# Altium PCB PCB.PcbDoc
Units mil, origin at the board's own origin, x right, y up, seen from the top; angles counter-clockwise.
Board outline 6000 x 4000 mil, 2 copper layers (Top Layer, Bottom Layer); 6 components, 0 nets, 182 pads, 0 vias.
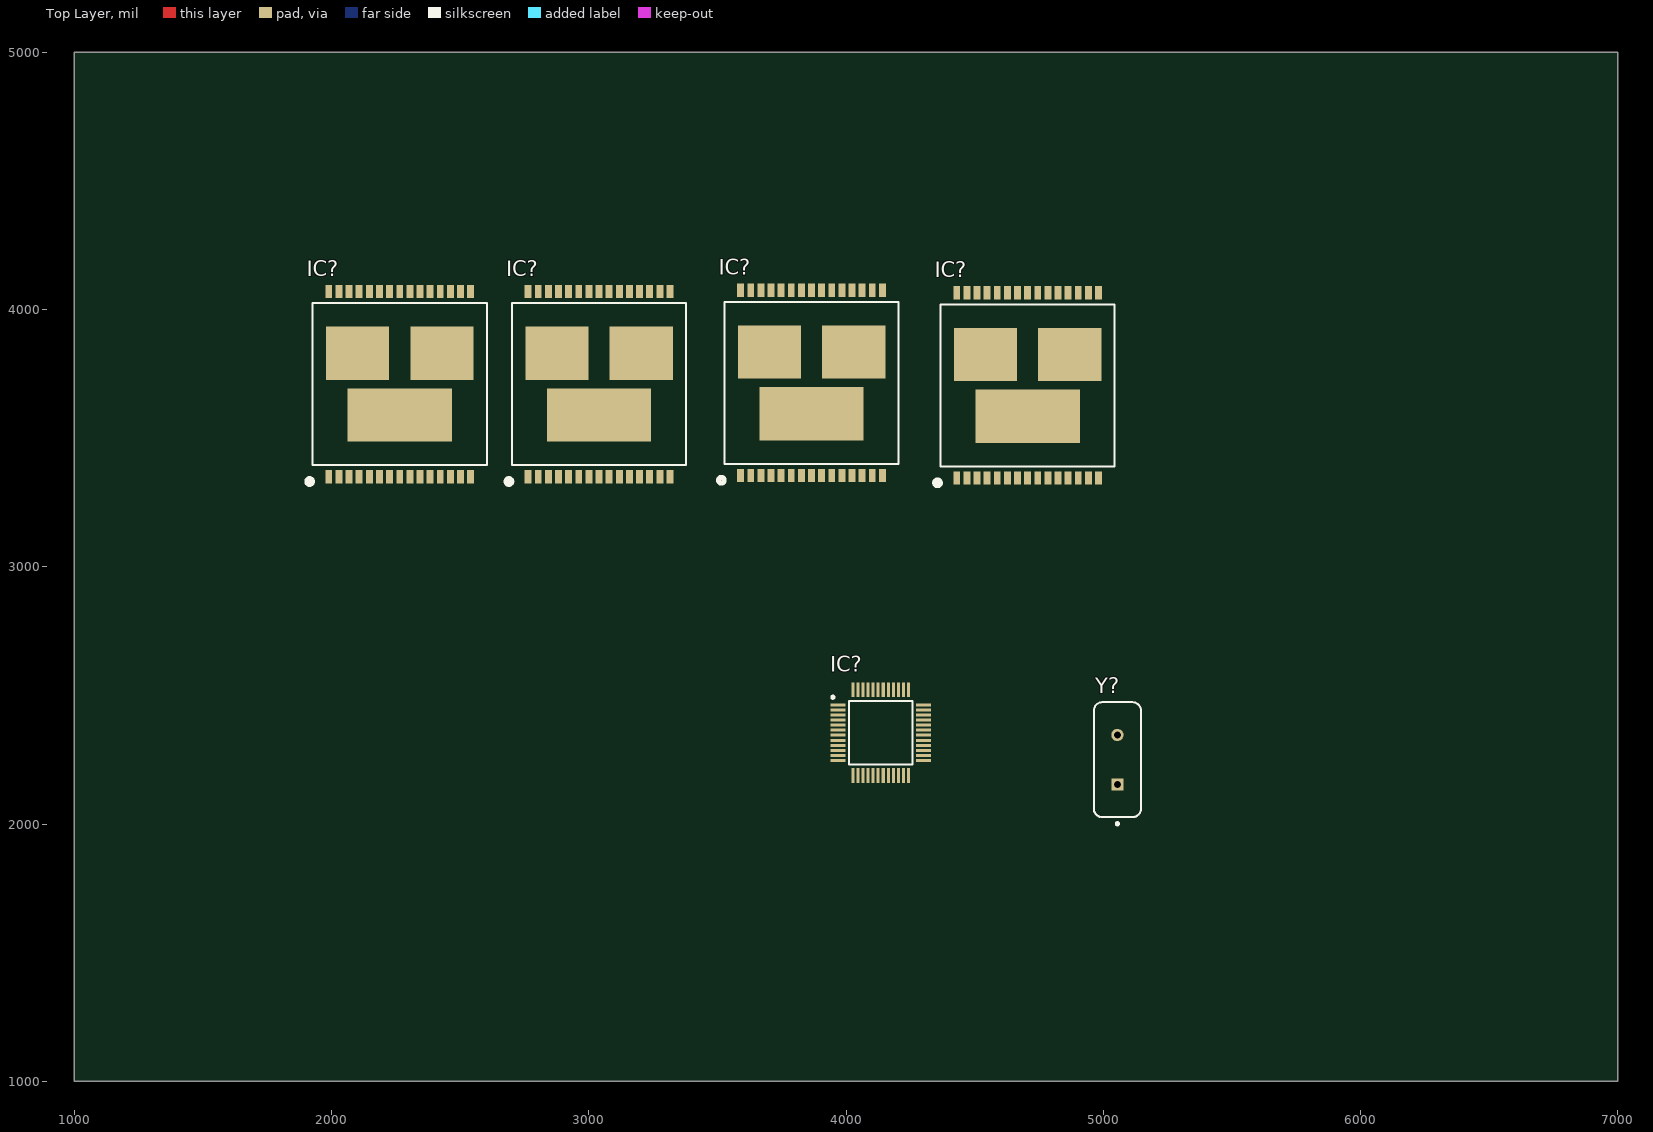
[diagram p0: Top Layer view]
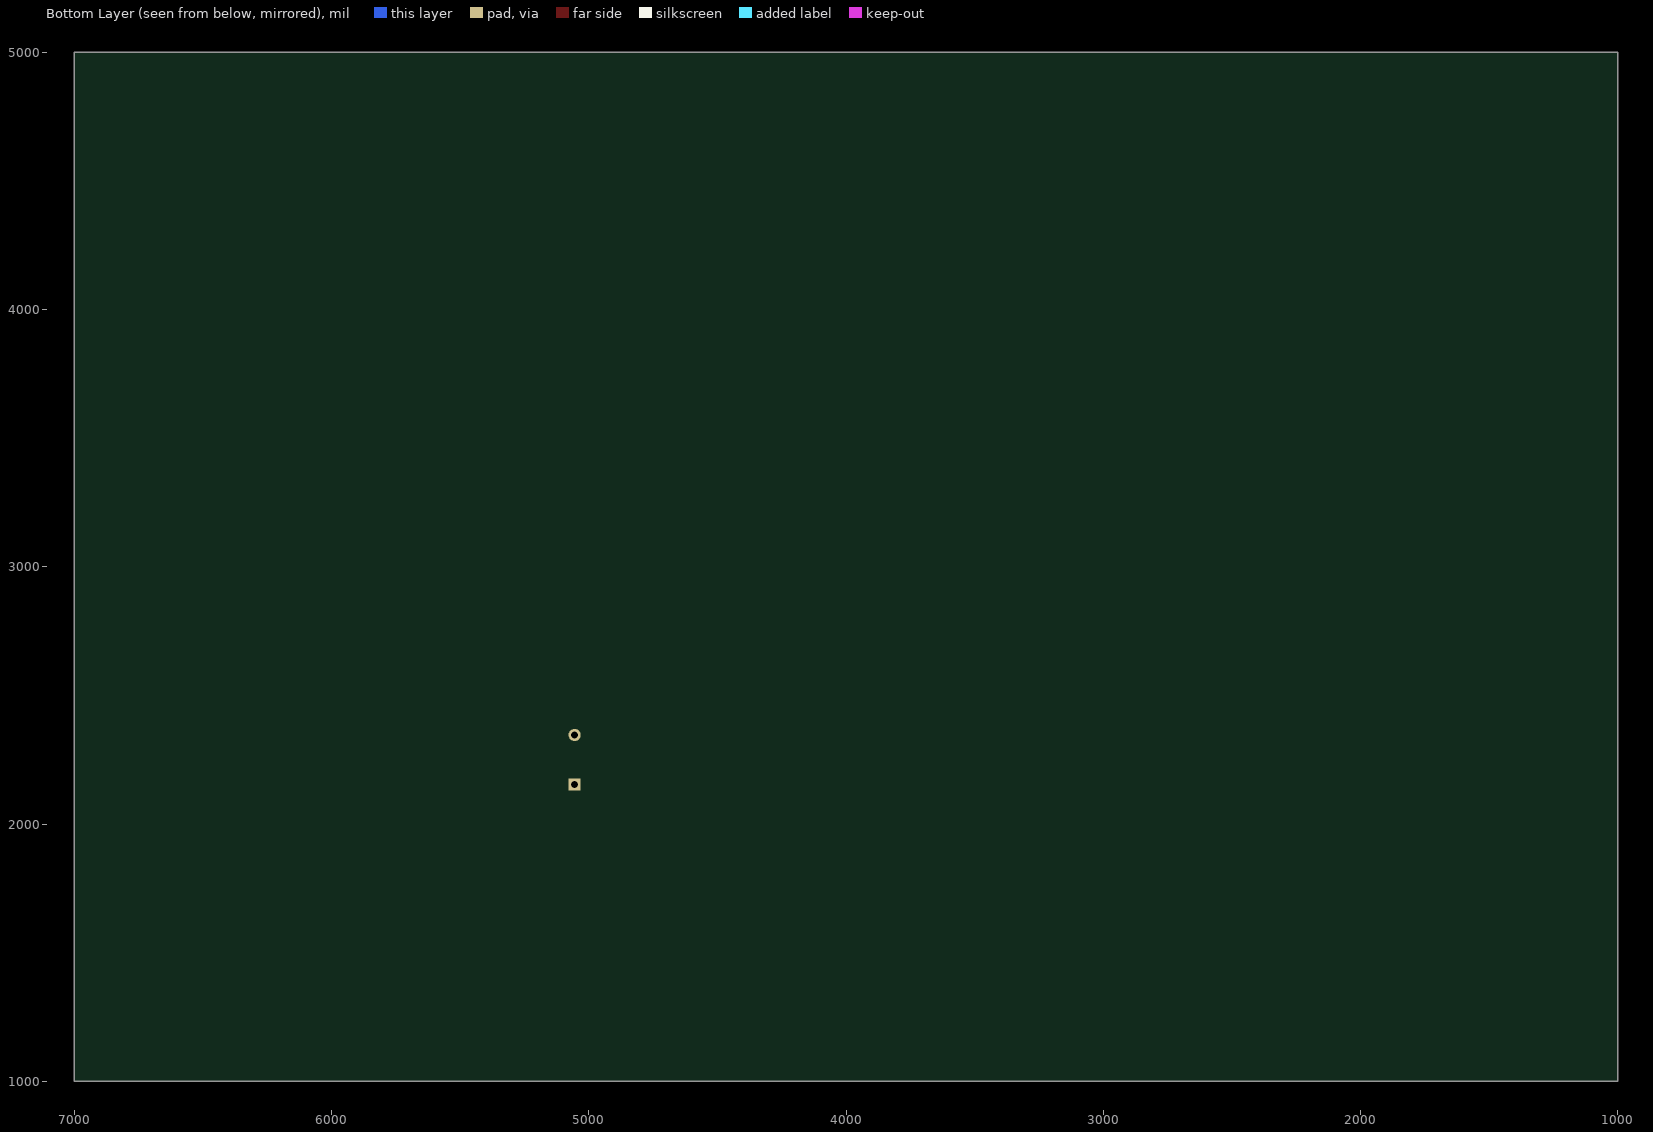
[diagram p1: Bottom Layer view, seen from below]

## Layer stack, top to bottom
Top Solder: solder mask 0.4, Solder Resist, Dk 3.5
Top Layer: signal copper 1.4
Dielectric 1: dielectric 12.6, FR-4, Dk 4.8
Bottom Layer: signal copper 1.4
Bottom Solder: solder mask 0.4, Solder Resist, Dk 3.5

## Board outline
1000,1000 7000,1000 7000,5000 1000,5000

## Design rules (kind name [scope] priority, off if disabled: settings)
Clearance [All] p1: gap=10 ignorepadtopadclearanceinfootprint=FALSE
PolygonConnect [All] p1: connectstyle=Relief reliefconductorwidth=10 reliefentries=4 polygonreliefangle="90 Angle" airgapwidth=10
RoutingVias [All] p1: holewidth=28 width=50 viastyle="Through Hole" minholewidth=28 minwidth=50 maxholewidth=28 maxwidth=50
SolderMaskExpansion [All] p1: expansion=4 istentingtop=FALSE
Width [All] p1: maxlimit=10 minlimit=10 preferedwidth=10
30 further rules are at their usual default settings.

## Classes and differential pairs
component class Microcontroller: IC? Y?
component class Motor_Drivers: IC?

## Components (designator, comment, footprint, x,y, rotation, side; value= is the part's Value field where it differs from the comment)
IC? "stm32f103c8t6" QFP50P900X900X160-48N 4135,2355 r0 top
IC? "VNH5019ATR-E" VNH5019A-E_1 3276.22,3946.3 r0 top
IC? "VNH5019ATR-E" VNH5019A-E_1 4102.24,3951.14 r0 top
IC? "VNH5019ATR-E" VNH5019A-E_1 4942.24,3941.14 r0 top
IC? "VNH5019ATR-E" VNH5019A-E_1 2501.22,3946.3 r0 top
Y? "FOXSLF/080-20" FOX-FOXSLF080-20 5055,2250 r90 top

## Footprints (in the part's own frame and the unit in brackets; to place one, negate y for a bottom-side part, rotate by r counter-clockwise, add the part's x,y. Pads: shape width x height; smd on the part's side, far side on the other; paste and mask are expansions set on the pad)
FOX-FOXSLF080-20 [mm] "THD, 2-Leads, Body 11.35x4.65mm"
  rect 1.2x1.2 hole 0.7: 1(-2.44,0)
  round 1.2 hole 0.7: 2(2.44,0)
  silkscreen extent -6.45,-2.32 5.68,2.32, body extent -5.67,-2.32 5.68,2.33, height 3.6
QFP50P900X900X160-48N [mm]
  rect 1.475x0.3 smd: 1(-4.238,2.75) 2(-4.238,2.25) 3(-4.238,1.75) 4(-4.238,1.25) 5(-4.238,0.75) 6(-4.238,0.25) 7(-4.238,-0.25) 8(-4.238,-0.75) 9(-4.238,-1.25) 10(-4.238,-1.75) 11(-4.238,-2.25) 12(-4.238,-2.75) 25(4.238,-2.75) 26(4.238,-2.25) 27(4.238,-1.75) 28(4.238,-1.25) 29(4.238,-0.75) 30(4.238,-0.25) 31(4.238,0.25) 32(4.238,0.75) 33(4.238,1.25) 34(4.238,1.75) 35(4.238,2.25) 36(4.238,2.75)
  rect 0.3x1.475 smd: 13(-2.75,-4.238) 14(-2.25,-4.238) 15(-1.75,-4.238) 16(-1.25,-4.238) 17(-0.75,-4.238) 18(-0.25,-4.238) 19(0.25,-4.238) 20(0.75,-4.238) 21(1.25,-4.238) 22(1.75,-4.238) 23(2.25,-4.238) 24(2.75,-4.238) 37(2.75,4.238) 38(2.25,4.238) 39(1.75,4.238) 40(1.25,4.238) 41(0.75,4.238) 42(0.25,4.238) 43(-0.25,4.238) 44(-0.75,4.238) 45(-1.25,4.238) 46(-1.75,4.238) 47(-2.25,4.238) 48(-2.75,4.238)
  silkscreen extent -4.85,-3.15 3.15,3.62, body extent -4.5,-4.5 4.5,4.5, height 1.6
VNH5019A-E_1 [mm]
  rect 0.68x1.3 smd: 1(-13,-15.15) 2(-12,-15.15) 3(-11,-15.15) 4(-10,-15.15) 5(-9,-15.15) 6(-8,-15.15) 7(-7,-15.15) 8(-6,-15.15) 9(-5,-15.15) 10(-4,-15.15) 11(-3,-15.15) 12(-2,-15.15) 13(-1,-15.15) 14(0,-15.15) 15(1,-15.15) 16(1,3.15) 17(0,3.15) 18(-1,3.15) 19(-2,3.15) 20(-3,3.15) 21(-4,3.15) 22(-5,3.15) 23(-6,3.15) 24(-7,3.15) 25(-8,3.15) 26(-9,3.15) 27(-10,3.15) 28(-11,3.15) 29(-12,3.15) 30(-13,3.15)
  rect 6.23x5.25 smd: 31(-10.165,-2.95) 32(-1.835,-2.95)
  rect 10.3x5.25 smd: 33(-6,-9.05)
  silkscreen extent -15.17,-15.89 2.6,2, body extent -14.61,-15.75 2.59,3.4, height 1.95

## Part data
IC?: "Integrated Circuit", Arrow Part Number=STM32F103C8T6, Manufacturer_Name=STMicroelectronics, Mouser Part Number=511-STM32F103C8T6, Arrow Price/Stock=https://www.arrow.com/en/products/stm32f103c8t6/stmicroelectronics?utm_currency=USD&region=nac, Datasheet Link=http://media.digikey.com/pdf/Data%20Sheets/ST%20Microelectronics%20PDFS/STM32F103x8,B.pdf, Height=1.6mm, Manufacturer_Part_Number=stm32f103c8t6, Mouser Price/Stock=https://www.mouser.co.uk/ProductDetail/STMicroelectronics/STM32F103C8T6?qs=bhCVus9SdFtq6kqxsU5%2FDA%3D%3D
IC? IC? IC? IC?: "Integrated Circuit", Manufacturer_Name=STMicroelectronics, Mouser Part Number=511-VNH5019ATR-E, Arrow Part Number=VNH5019ATR-E, Arrow Price/Stock=https://www.arrow.com/en/products/vnh5019atr-e/stmicroelectronics?region=nac, Datasheet Link=https://www.st.com/resource/en/datasheet/vnh5019a-e.pdf, Manufacturer_Part_Number=VNH5019ATR-E, Mouser Price/Stock=https://www.mouser.co.uk/ProductDetail/STMicroelectronics/VNH5019ATR-E?qs=T%2FOtf55vL7cDceYVZzSNKw%3D%3D
Y?: library part CMP-1749-00002-1, "Resistance Weld Thru-Hole Crystal, 8 MHz, -20 to 70 degC, 2-Pin THD, RoHS, Bulk", Case\Package=TO-263-3, Dropout Voltage="2 V", Max Input Voltage="35 V", Max Operating Temperature="125 degC", Max Ouput Current="1 A", Min Input Voltage="7 V", Min Operating Temperature="0 degC", Nominal Output Voltage="5 V", Package Quantity=50, ComponentLink1Description="Manufacturer URL", ComponentLink1URL=http://www.foxonline.com/, ComponentLink2Description=Datasheet, ComponentLink2URL=http://download.siliconexpert.com/pdfs/2015/4/5/6/5/7/200/fox_/manual/35607121449963728hc49slf.pdf, DatasheetVersion=Mar-15, Height="30.02 mm", Length="10.24 mm", Mount="Surface Mount", Output Current="1 A", Output Voltage="5 V", Outputs=1, PackageDescription="2-Pin Through Hole Device, Body 11.35 x 4.65 mm", PackageReference=FOXSLF080-20, Packaging=Rail/Tube, Pins=3, Radiation Hardening=No, REACH SVHC="No SVHC", RoHSCompliant=true, Width="9.35 mm"

## Nets (pads, with @x,y where several pads share a name; then routed paths per layer and width w, separated by ;. In a path a pad name is that pad's centre, name@x,y a point inside that pad or via, vN(x,y) a via of type N, cw(c..) or ccw(c..) an arc to the next point about the centre after c; other vN are vias at no path point)
pads on no net: IC?.1 IC?.2 IC?.3 IC?.4 IC?.5 IC?.6 IC?.7 IC?.8 IC?.9 IC?.10 IC?.11 IC?.12 IC?.13 IC?.14 IC?.15 IC?.16 IC?.17 IC?.18 IC?.19 IC?.20 IC?.21 IC?.22 IC?.23 IC?.24 IC?.25 IC?.26 IC?.27 IC?.28 IC?.29 IC?.30 IC?.31 IC?.32 IC?.33 IC?.34 IC?.35 IC?.36 IC?.37 IC?.38 IC?.39 IC?.40 IC?.41 IC?.42 IC?.43 IC?.44 IC?.45 IC?.46 IC?.47 IC?.48 Y?.1 Y?.2